# Altium PCB Hbridge.PcbDoc
Units mil, origin at the board's own origin, x right, y up, seen from the top; angles counter-clockwise.
Board outline 4047.4 x 2102.4 mil, 2 copper layers (Top Layer, Bottom Layer); 37 components, 0 nets, 90 pads, 2 vias.
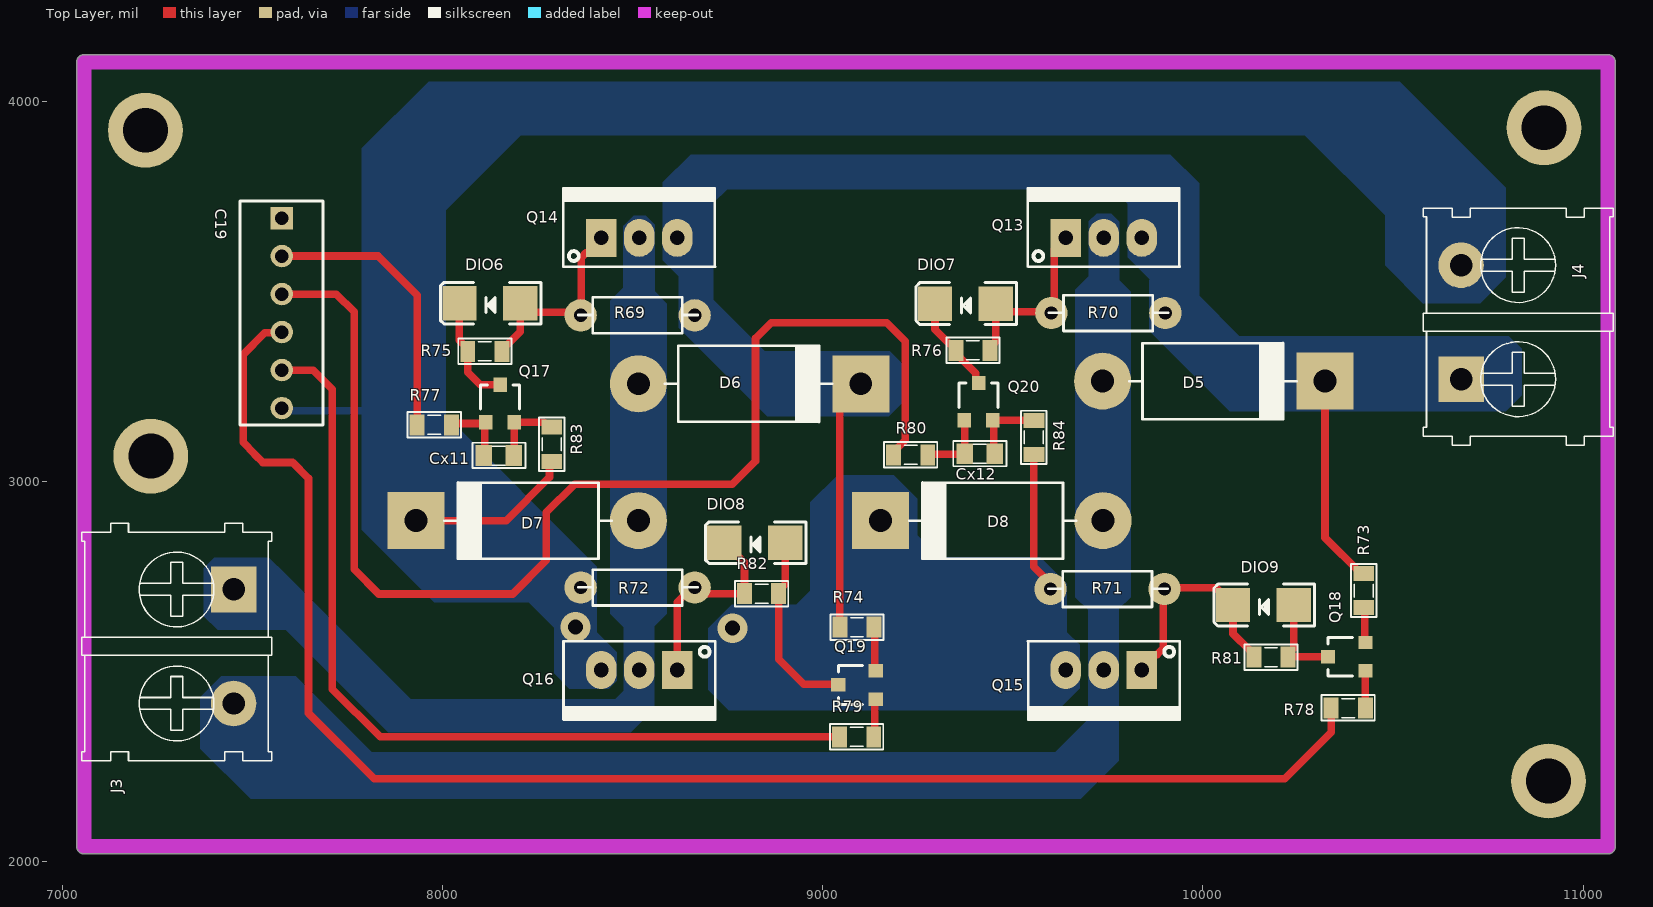
[diagram p0: Top Layer view]
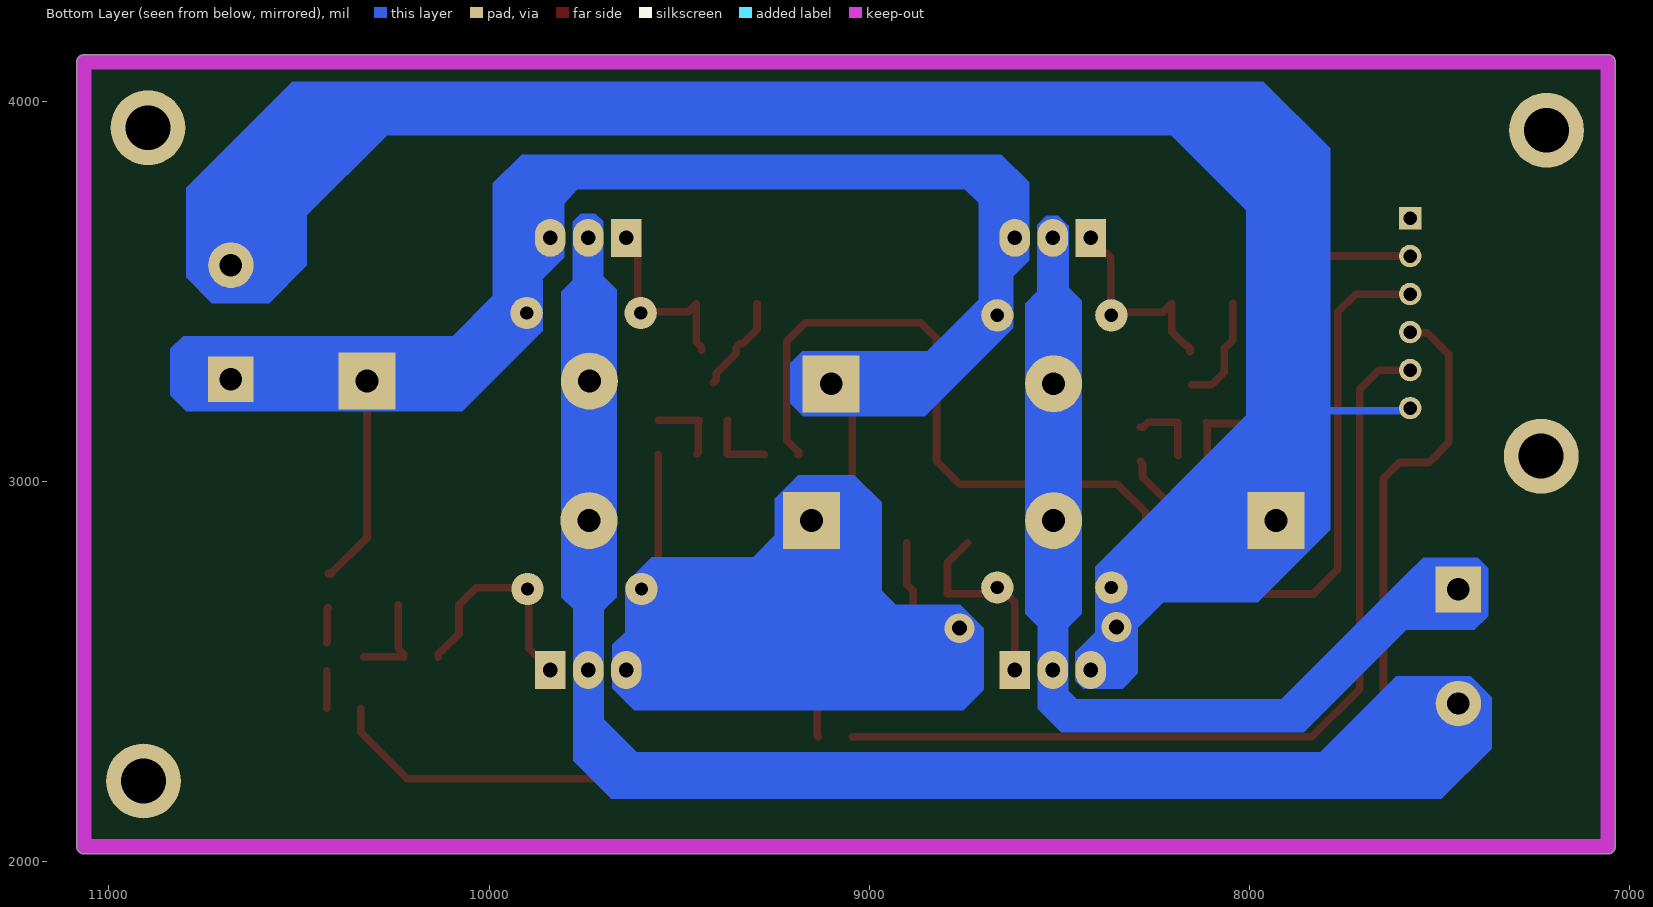
[diagram p1: Bottom Layer view, seen from below]

## Layer stack, top to bottom
Top Solder: solder mask 0.4, Solder Resist, Dk 3.5
Top Layer: signal copper 1.4
Dielectric 1: dielectric 12.6, FR-4, Dk 4.8
Bottom Layer: signal copper 1.4
Bottom Solder: solder mask 0.4, Solder Resist, Dk 3.5

## Board outline
7037.3,2040 ccw(c7057,2040) 7057,2020.3 11065,2020.3 ccw(c11065,2040) 11084.7,2040 11084.7,4103 ccw(c11065,4103) 11065,4122.7 7057,4122.7 ccw(c7057,4103) 7037.3,4103

## Design rules (kind name [scope] priority, off if disabled: settings)
Clearance [All] p1: gap=10 ignorepadtopadclearanceinfootprint=FALSE except(0: Arc-Hole Track-Hole SMDPad-Hole THPad-Hole Via-Hole Fill-Hole Poly-Hole Region-Hole Text-Hole)
PolygonConnect [All] p1: connectstyle=Relief reliefconductorwidth=10 reliefentries=4 polygonreliefangle="90 Angle" airgapwidth=10
RoutingVias [All] p1: holewidth=28 width=50 viastyle="Through Hole" minholewidth=28 minwidth=50 maxholewidth=28 maxwidth=50
SolderMaskExpansion [All] p1: expansion=4 istentingtop=FALSE
Width [All] p1: maxlimit=10 minlimit=10 preferedwidth=10
30 further rules are at their usual default settings.

## Components (designator, comment, footprint, x,y, rotation, side; value= is the part's Value field where it differs from the comment)
C19 "Header6" HDR6 7577,3693 r270 top
Cx11 "104" CN-SMD-0805 8148,3068 r180 top value=33pF
Cx12 "104" CN-SMD-0805 9413,3073 r180 top value=33pF
D5 "5A" DIO-5A 10296,3264 r180 top value=1N5007
D6 "5A" DIO-5A 9075,3257 r180 top value=1N5007
D7 "5A" DIO-5A 7955,2897 r0 top value=1N5007
D8 "5A" DIO-5A 9177,2897 r0 top value=1N5007
DIO6 "M7" DIO-SMD-106 8124,3469 r0 top value=1N5007
DIO7 "M7" DIO-SMD-106 9375,3468 r0 top value=1N5007
DIO8 "M7" DIO-SMD-106 8821,2839 r0 top value=1N5007
DIO9 "M7" DIO-SMD-106 10159,2675 r0 top value=1N5007
J3 "KF2" KF2-7.62 7300,2566 r270 top
J4 "KF2" KF2-7.62 10829,3419 r90 top
Q13 "IRF4905" TO220-123 9639,3641 r0 top value=IRF840
Q14 "IR4905" TO220-123 8417,3641 r0 top value=IRF840
Q15 "IRF3205" TO220-123 9839,2504 r180 top value=IRF840
Q16 "IRF3205" TO220-123 8617,2504 r180 top value=IRF840
Q17 "2SC1815" SOT23-321 8151,3205 r0 top value=C1815
Q18 "2SA1015" SOT23-321 10378,2539 r90 top value=A1015
Q19 "2SA1015" SOT23-321 9090,2465 r90 top value=A1015
Q20 "2SC1815" SOT23-321 9410,3210 r0 top value=C1815
R69 "1k" RES-1/4W-SMALL 8523,3437 r180 top
R70 "1k" RES-1/4W-SMALL 9761,3443 r180 top
R71 "10k" RES-1/4W-SMALL 9759,2717 r180 top
R72 "10k" RES-1/4W-SMALL 8523,2721 r180 top
R73 "1k" RES-SMD-0805 10423,2713 r270 top
R74 "1k" RES-SMD-0805 9090,2617 r0 top
R75 "1k" RES-SMD-0805 8111,3342 r180 top
R76 "1k" RES-SMD-0805 9395,3345 r180 top
R77 "1k" RES-SMD-0805 7978,3149 r180 top
R78 "1k" RES-SMD-0805 10382,2404 r180 top
R79 "1k" RES-SMD-0805 9089,2328 r180 top
R80 "1k" RES-SMD-0805 9231,3070 r180 top
R81 "1k" RES-SMD-0805 10179,2538 r0 top
R82 "1k" RES-SMD-0805 8839,2705 r0 top
R83 "1k" RES-SMD-0805 8287,3098 r270 top
R84 "1k" RES-SMD-0805 9555,3116 r270 top

## Footprints (in the part's own frame and the unit in brackets; to place one, negate y for a bottom-side part, rotate by r counter-clockwise, add the part's x,y. Pads: shape width x height; smd on the part's side, far side on the other; paste and mask are expansions set on the pad)
CN-SMD-0805 [mil]
  rect 43.31x55 smd paste+0 mask+4: 1(-39.36,0.01) 2(39.37,0.01)
  silkscreen extent -70,-34 70,33, body extent -39,-25 39,25, height 31
DIO-5A [mil] "Diode 5A, W 200mil, L 550mil"
  round 150 hole 60 paste+0 mask+4: 1(560,0)
  rect 150x150 hole 60 paste+0 mask+4: 2(-25,0)
  silkscreen extent 50,-100 490,100, body extent -52,-106 590,103, height 211
DIO-SMD-106 [mil]
  rect 90x90.55 smd paste+0 mask+4: 1(80,0) 2(-80,0)
  silkscreen extent -130,-55 135,55, body extent -99,-50 106,52, height 95
HDR6 [mm] "Connector; Header; 6 Position"
  rect 1.5x1.5 hole 0.9 paste+0 mask+0.102: 1(0,0)
  round 1.5 hole 0.9 paste+0 mask+0.102: 2(2.54,0) 3(5.08,0) 4(7.62,0) 5(10.16,0) 6(12.7,0)
  silkscreen extent -1.14,-2.79 13.84,2.74, body extent -1.27,-2.92 13.97,2.88, height 11.72
KF2-7.62 [mil]
  rect 120x120 hole 59.06 paste+0 mask+4: 1(-150,150)
  round 120 hole 59.06 paste+0 mask+4: 2(150,150)
  silkscreen extent -324,-250 300,250, body extent -300,-241 300,231, height 337
RES-1/4W-SMALL [mil]
  round 85 hole 35 paste+0 mask+4: 1(-140,0) 2(160,0)
  silkscreen extent -148,-47 166,47, body extent -152,-47 172,47, height 97
RES-SMD-0805 [mil]
  rect 39.37x55 smd paste+0 mask+4: 1(-45,0) 2(45,0)
  silkscreen extent -70,-34 70,33, body extent -39,-25 39,25, height 31
SOT23-321 [mm]
  rect 0.9x0.95 smd mask+0: 1(0.95,-1.25)
  rect 0.9x0.95 smd paste+0 mask+0: 2(0,1.25) 3(-0.95,-1.25)
  silkscreen extent -1.3,-0.38 1.3,1.25, body extent -1.52,-1.23 1.48,1.27, height 1.06
TO220-123 [mil] "TO-220 - 1-2-3"
  rect 80x100 hole 39 paste+0 mask+4: 1(0,0)
  oval 80x100 hole 39 paste+0 mask+4: 2(100,0) 3(200,0)
  silkscreen extent -100,-76 300,130, body extent -95,-80 295,97, height 323

## Part data
C19: "Header IDC, 6 x 1 Pin Vertical 2.54mm Pitch (Non-Boxed, Male)", Manufacturer="W¨¹rth Elektronik eiSos GmbH", partNo=613002143121, ComponentLink1 Description=Manufacturer, ComponentLink1URL=http://www.we-online.com, ComponentLink2 Description=Datasheet, ComponentLink2URL=http://katalog.we-online.de/em/datasheet/6130xx143121.pdf, Created by="Karrer Zheng", Created Date="29 March 2013", NoPins=02
Cx11 Cx12: library part CN
D5 D6 D7 D8: library part Diode, "Default Diode", Code - JEDEC=DO-214-AB, Published=8-Jun-2000, Publisher="Altium Limited", Revision="July-2002: Re-released for DXP Platform."
DIO6 DIO7 DIO8 DIO9: library part "Diode SMD", "Default Diode", Code - JEDEC=DO-214-AB, Published=8-Jun-2000, Publisher="Altium Limited", Revision="July-2002: Re-released for DXP Platform."
J3 J4: Manufacturer="Würth Elektronik eiSos GmbH", partNo=691103110002, ComponentLink1 Description=Manufacturer, ComponentLink1URL=http://www.we-online.com, ComponentLink2 Description=Datasheet, ComponentLink2URL=http://katalog.we-online.de/em/datasheet/6911031100xx.pdf, Created by="Karrer Zheng", Created Date="29 October 2013", NoPins=2
Q13 Q14: library part IRF9540, "HEXFET P-Channel Power MOSFET"
Q15 Q16: library part IRFZ44
Q17 Q20: "NPN 600mW, ECB"
Q18 Q19: "PNP 600mW, ECB"
R69 R70 R71 R72: library part Res, "Res", Manufacturer="Generic Components", Class=Passive, Published=08/06/2000, Publisher="Altium Hobart Technology Centre", SubClass=R
R73 R74 R75 R76 R77 R78 R79 R80 R81 R82 R83 R84: library part Res-SMD, "Resistor", Manufacturer="Generic Components", Class=Passive, Published=08/06/2000, Publisher="Altium Hobart Technology Centre"

## Free pads (board coordinates)
  round 196.85 hole 118.11 paste+0 mask+0: 2(7218,3924) 2(7232.35,3066.57) 2(10897.35,3930.57) 2(10909,2212)

## Via types
v1: diameter 78.74, hole 39.37, Top Layer to Bottom Layer, 2 vias

## Nets (pads, with @x,y where several pads share a name; then routed paths per layer and width w, separated by ;. In a path a pad name is that pad's centre, name@x,y a point inside that pad or via, vN(x,y) a via of type N, cw(c..) or ccw(c..) an arc to the next point about the centre after c; other vN are vias at no path point)
pads on no net: C19.1 C19.2 C19.3 C19.4 C19.5 C19.6 Cx11.1 Cx11.2 Cx12.1 Cx12.2 D5.1 D5.2 D6.1 D6.2 D7.1 D7.2 D8.1 D8.2 DIO6.1 DIO6.2 DIO7.1 DIO7.2 DIO8.1 DIO8.2 DIO9.1 DIO9.2 J3.1 J3.2 J4.1 J4.2 Q13.1 Q13.2 Q13.3 Q14.1 Q14.2 Q14.3 Q15.1 Q15.2 Q15.3 Q16.1 Q16.2 Q16.3 Q17.1 Q17.2 Q17.3 Q18.1 Q18.2 Q18.3 Q19.1 Q19.2 Q19.3 Q20.1 Q20.2 Q20.3 R69.1 R69.2 R70.1 R70.2 R71.1 R71.2 R72.1 R72.2 R73.1 R73.2 R74.1 R74.2 R75.1 R75.2 R76.1 R76.2 R77.1 R77.2 R78.1 R78.2 R79.1 R79.2 R80.1 R80.2 R81.1 R81.2 R82.1 R82.2 R83.1 R83.2 R84.1 R84.2
copper on no net: | length 17307.5
  Top Layer w20: 7577,3293 7660,3293 7710,3243 7710,2454 7836,2328 9044,2328 ; 7577,3393 7575,3391 7532,3391 7475,3334 7475,3103 7506,3072 7506,3071 7527,3050 7605,3050 7647,3008 7647,2391 7820,2218 10215,2218 10337,2340 10337,2404 ; 7577,3493 7720,3493 7767,3446 7767,2769 7832,2704 8184,2704 8273,2793 8273,2919 8347,2993 8762,2993 8823,3054 8823,3377 8864,3418 9168,3418 9217,3369 9217,3108.81 9186,3077.81 9186,3070 ; 7577,3593 7830,3593 7933,3490 7933,3149 ; 7930,2897 8167,2897 8281,3011 8281,3047 8287,3053 ; 8023,3149 8026.4,3152.39 8110.2,3152.39 8111.11,3153.3 ; 8044,3469 8044,3371.82 8066,3349.81 8066,3342 8066,3287 8098.79,3254.21 8151,3254.21 ; 8108.63,3067.99 8111.11,3070.48 8111.11,3153.3 ; 8113.6,3155.79 8111.11,3153.3 ; 8156,3342 8156,3349.81 8165.69,3359.5 8169.78,3359.5 8204,3393.72 8204,3469 8228,3445 8355,3445 8363,3437 ; 8187.36,3067.99 8187.88,3068.51 8187.88,3155.27 8188.4,3155.79 8266.4,3155.79 8279.19,3143 8287,3143 ; 8365,3468 8365,3589 8377,3601 8387,3601 8417,3631 8417,3641 ; 8617,2504 8617,2682 8656,2721 8680.59,2721 8696.59,2705 8794,2705 8794,2785.73 8741,2838.72 8741,2839 ; 8901,2839 8901,2729.82 8884,2712.81 8884,2705 8884,2533 8950,2467 9038.79,2467 9040.79,2465 ; 9045,2617 9045,3202 9100,3257 ; 9134,2328 9136.61,2330.61 9136.61,2424.99 9139.21,2427.6 ; 9135,2617 9137.11,2614.89 9137.11,2504.51 9139.21,2502.4 ; 9276,3070 9277.5,3071.5 9372.13,3071.5 9373.63,3072.99 9373.11,3073.51 9373.11,3160.27 9372.6,3160.79 ; 9295,3468 9295,3400 9332.5,3362.5 9340.32,3362.5 9350,3352.81 9350,3345 9350,3337.19 9402.28,3284.9 9402.28,3266.93 9410,3259.21 ; 9440,3345 9440,3352.81 9455,3367.81 9455,3468 9476,3447 9597,3447 9601,3443 ; 9452.36,3072.99 9449.88,3075.48 9449.88,3158.31 9447.4,3160.79 9447.51,3160.89 9554.89,3160.89 9555,3161 ; 9555,3071 9555,2775.53 9599,2731.53 9599,2717 ; 9603,3468 9609,3474 9609,3611 9639,3641 ; 9839,2504 9839,2514 9869,2544 9879,2544 9896,2561 9896,2714 9902,2720 10034.28,2720 10079,2675.28 10079,2675 10079,2599.72 10123.22,2555.5 10124.31,2555.5 10134,2545.81 10134,2538 ; 10239,2675 10239,2560.82 10224,2545.81 10224,2538 10224.5,2538.5 10328.29,2538.5 10328.79,2539 ; 10321,3264 10321,2852.19 10415.19,2758 10423,2758 ; 10423,2668 10425.11,2665.89 10425.11,2578.51 10427.21,2576.4 ; 10427,2404 10427.11,2404.11 10427.11,2501.49 10427.21,2501.6
  Bottom Layer w20: 7577,3193 7584,3186 7844,3186 ; v1@8742,2603 8752,2603 v1(8763,2614)
  other v1: 8349,2617

## Keep-outs
Keep-Out Layer:
  lines w39.37: 7057,2040 7057,4103 11065,4103 11065,2040 7057,2040

## Other copper
Bottom Layer:
  region: 9676,2456 9676,2570 9642,2604 9642,2731 9572,2801 9305,2801 9248,2858 9248,2955 9186,3017 9039,3017 8967,2945 8967,2713 8930,2676 8760,2676 8698,2614 8698,2452 8752,2398 9618,2398
  region: 10693,3469 10729,3469 10797,3537 10797,3773 10518,4052 7963,4052 7787,3876 7787,2873 7978,2682 8226,2682 8293,2615 8293,2495 8333,2455 8437,2455 8458,2476 8458,2551 8406,2603 8406,2723 8406,2776 8008,3174 8008,3714 8205,3911 10268,3911 10479,3700 10479,3569 10580,3468
  region: 9698,2374 9612,2288 7814,2288 7614,2488 7418,2488 7363,2433 7363,2297 7495,2165 9678,2165 9778,2265 9778,2552 9757,2573 9755,2571 9708.5,2571 9698,2560.5
  region: 7371,2756 7371,2772 7399,2800 7543,2800 7587,2756 7916,2427 8454,2427 8477,2450 8477,2530 8502,2555 8543.5,2555 8557,2541.5 8557,2402 8495,2340 7857,2340 7587,2610 7408,2610 7372,2646
  region: 7510,2551
  region: 8579,3654 8579,3787 8652,3860 9914,3860 9990,3784 9990,3532 9948,3530 9860,3530 9860,3532 9802,3590 9802,3731.06 9768,3769 8748,3769 8712,3733 8712,3654
  region: 8579,3671
  region: 7357,2721
  region: 9828,3698 9802,3672 9802,3590 9861,3531 9859,3529 9859,3396 10070,3185 10398,3185 10796,3185 10838,3227 10838,3349 10805,3382 10096,3382 9990,3488 9990,3653 9947,3696
  region: 8600,3692 8579,3671 8579,3582 8621,3540 8621,3405 8854,3172 9174,3172 9208,3206 9208,3311 9176,3343 8847,3343 8712,3478 8712,3654 8674,3692
  region: 9720,3704 9759,3704 9780,3683 9780,3529 9810,3499 9810,2696 9779,2665 9779,2459 9760,2440 9717,2440 9698,2459 9698,2662 9664,2696 9664,3504 9700,3540 9700,3684
  region: 9699,3661
  region: 8477,3673 8503,3699 8534,3699 8558,3675 8558,3500 8590,3468 8590,2652 8557,2619 8557,2464 8541,2448 8489,2448 8477,2460 8477,2616 8441,2652 8441,3475 8475,3509 8475,3673

## Silkscreen, mask and mechanical layers (free items; w line width, h text height)
Bottom Solder:
  lines w30: 8757,2465 9572,2465 ; 8762,2535 9557,2535 ; 8857,2610 9587,2610 ; 8997,2680 9547,2680 ; 9022,2800 9022,2950 ; 9032,2750 9527,2750
  lines w39.37: 10679,3663 10679,3569 10679,3692 10682,3695
  lines w40: 7450,2716 7556,2716 7887,2385 8477,2385 8517,2425 8517,2504
  lines w50: 8349,2617 8349,2528 8373,2504 ; 8517,2504 8517,3641 ; 9092,3265 8843,3265 8667,3441 8667,3585 8617,3635 8617,3725 8707,3815 9837,3815 9901,3751 9901,3443 ; 9737,2310 9737,2502 9737,2905 9736,2906 9736,3279 9732,3283 9732,3645 9737,3650
  lines w70: 7450,2416 7450,2317 7542,2225 9652,2225 9737,2310
  lines w80: 8363,2721 8321,2721 8145,2897 7930,2897 7907,2920 7907,3795 8092,3980 10377,3980 10679,3678 10679,3569 ; 9917,3445 10072,3290 10093,3269 10679,3269